# Altium PCB PCB_v2.PcbDoc
Units mm, origin at the board's own origin, x right, y up, seen from the top; angles counter-clockwise.
Board outline 65 x 45 mm, 2 copper layers (Top Layer, Bottom Layer); 48 components, 33 nets, 130 pads, 33 vias.
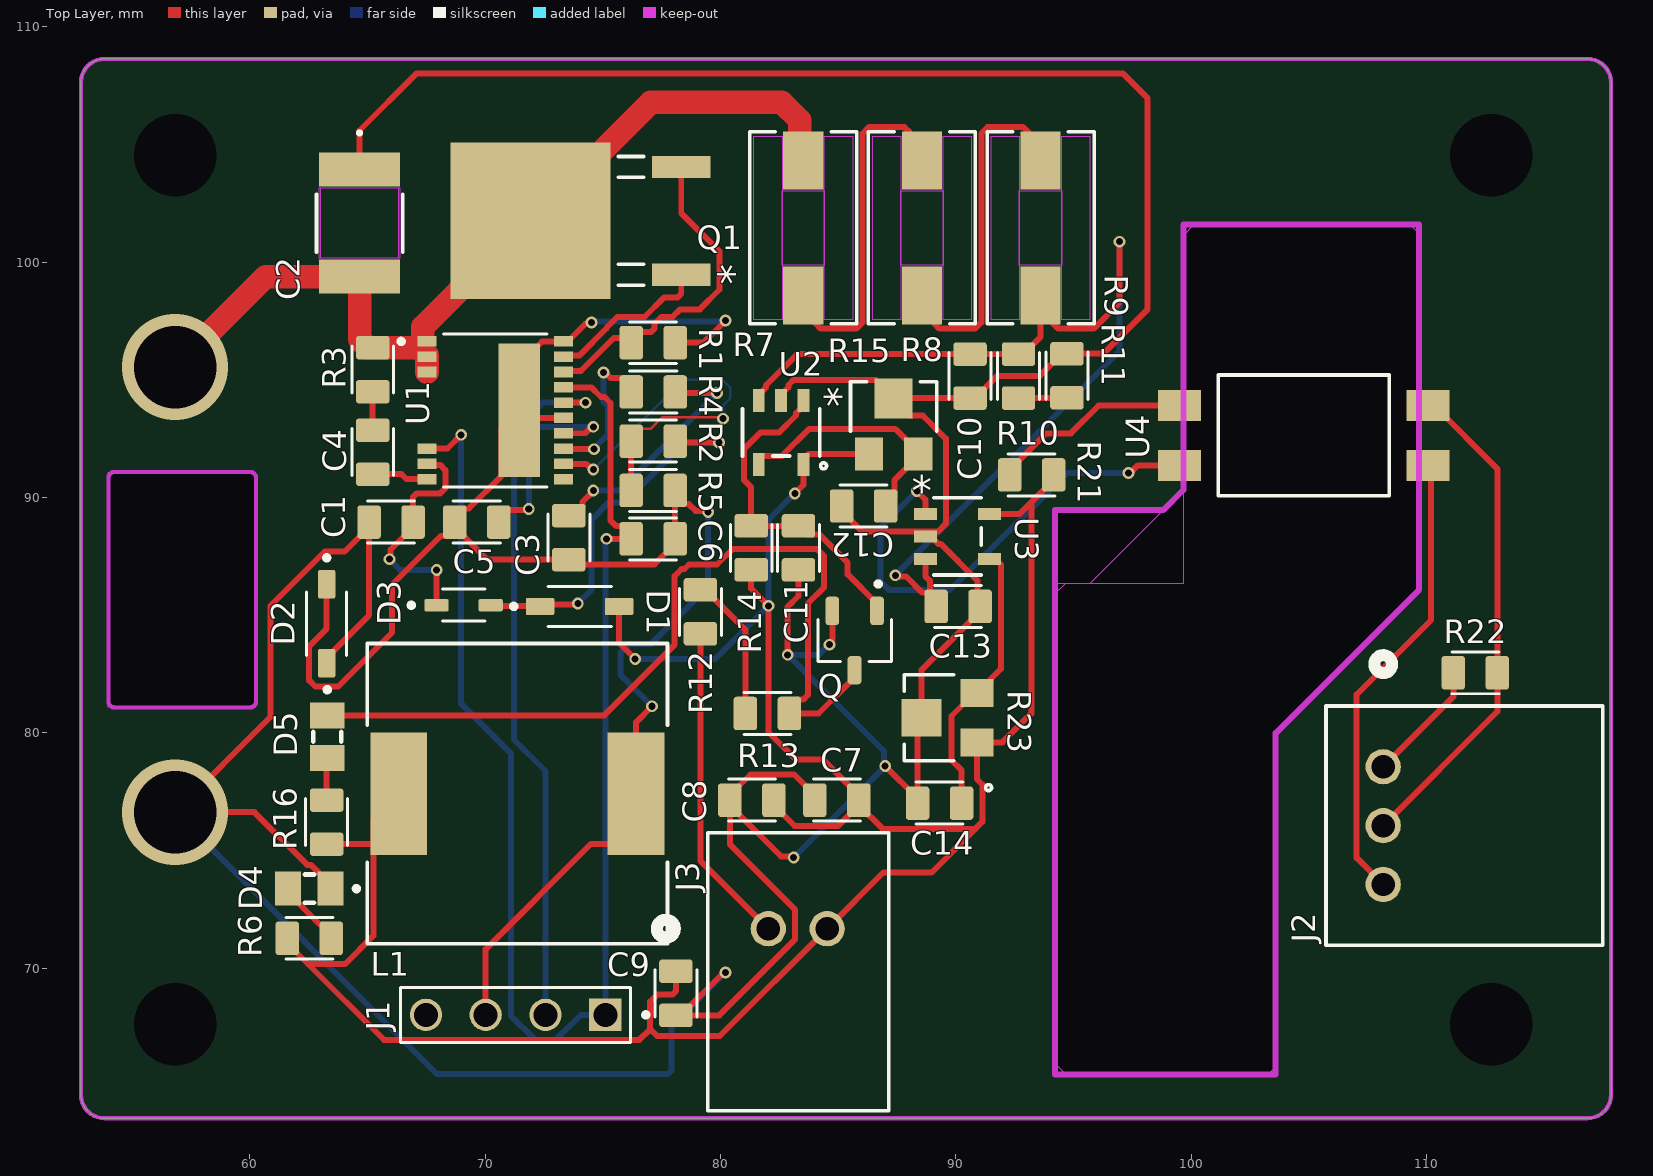
[diagram p0: Top Layer view]
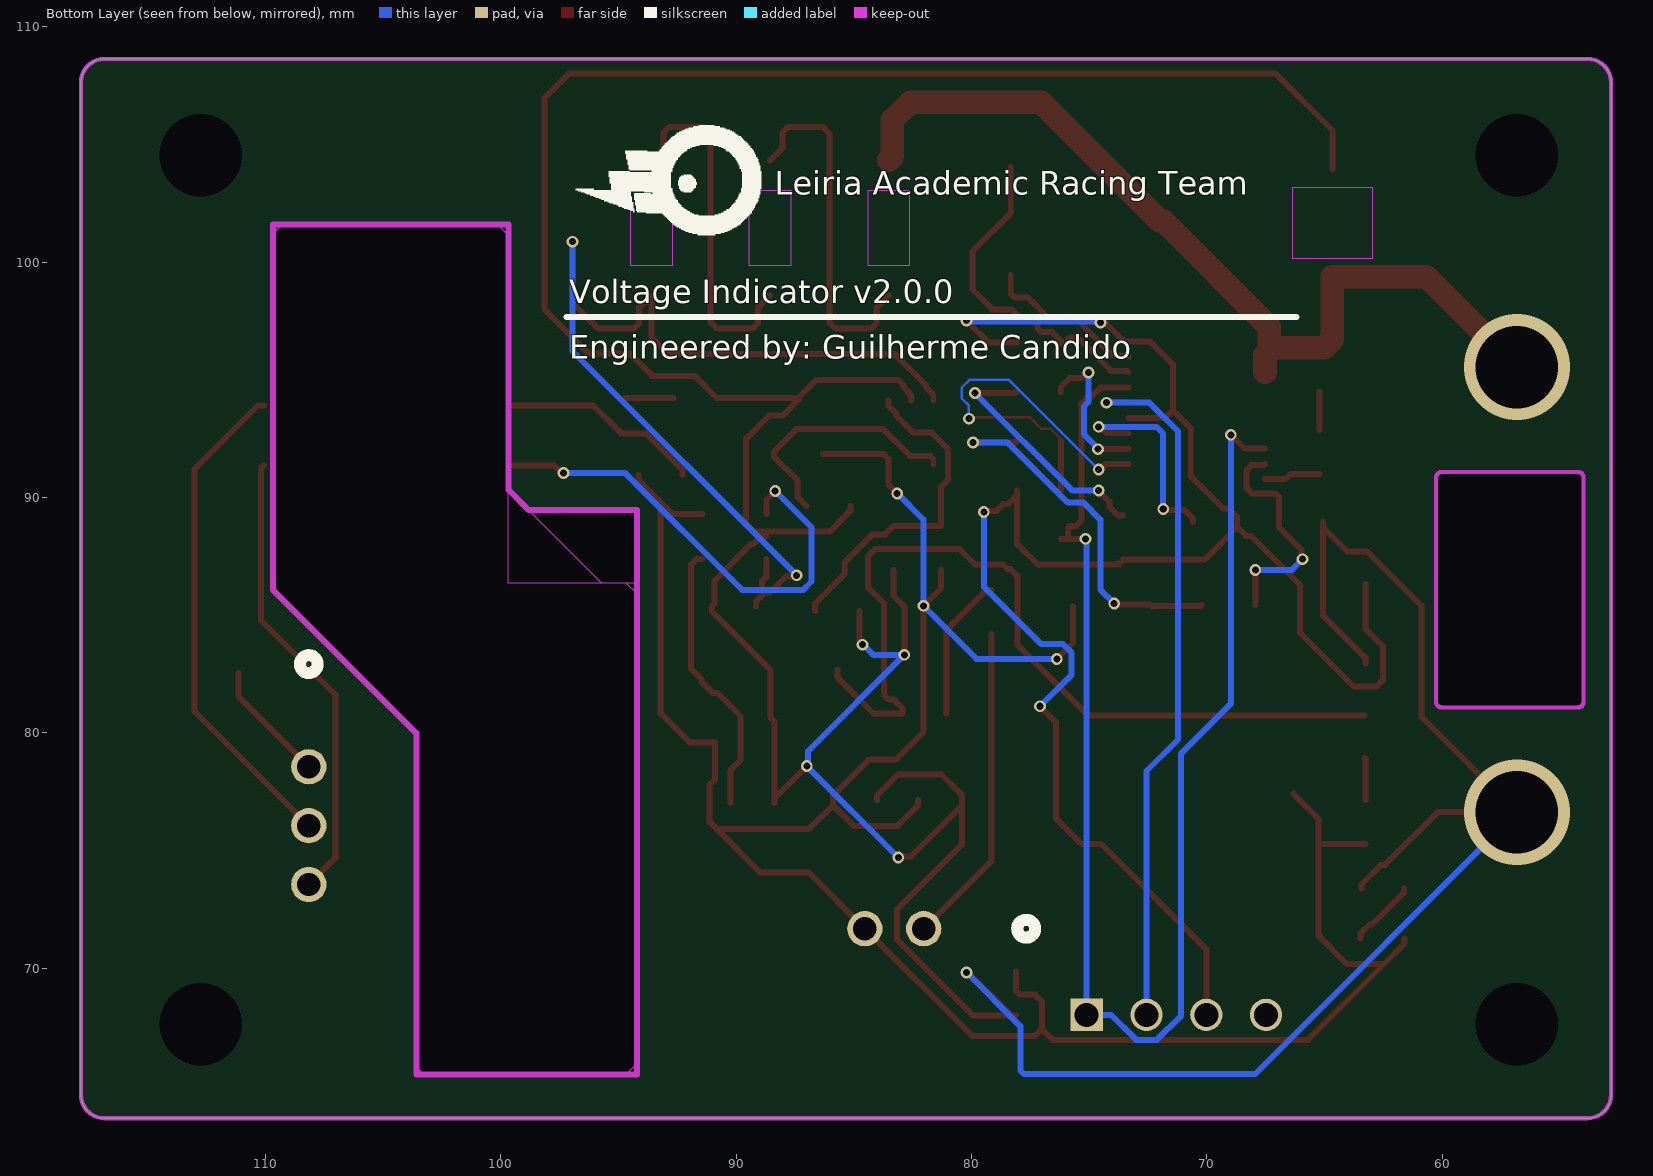
[diagram p1: Bottom Layer view, seen from below]
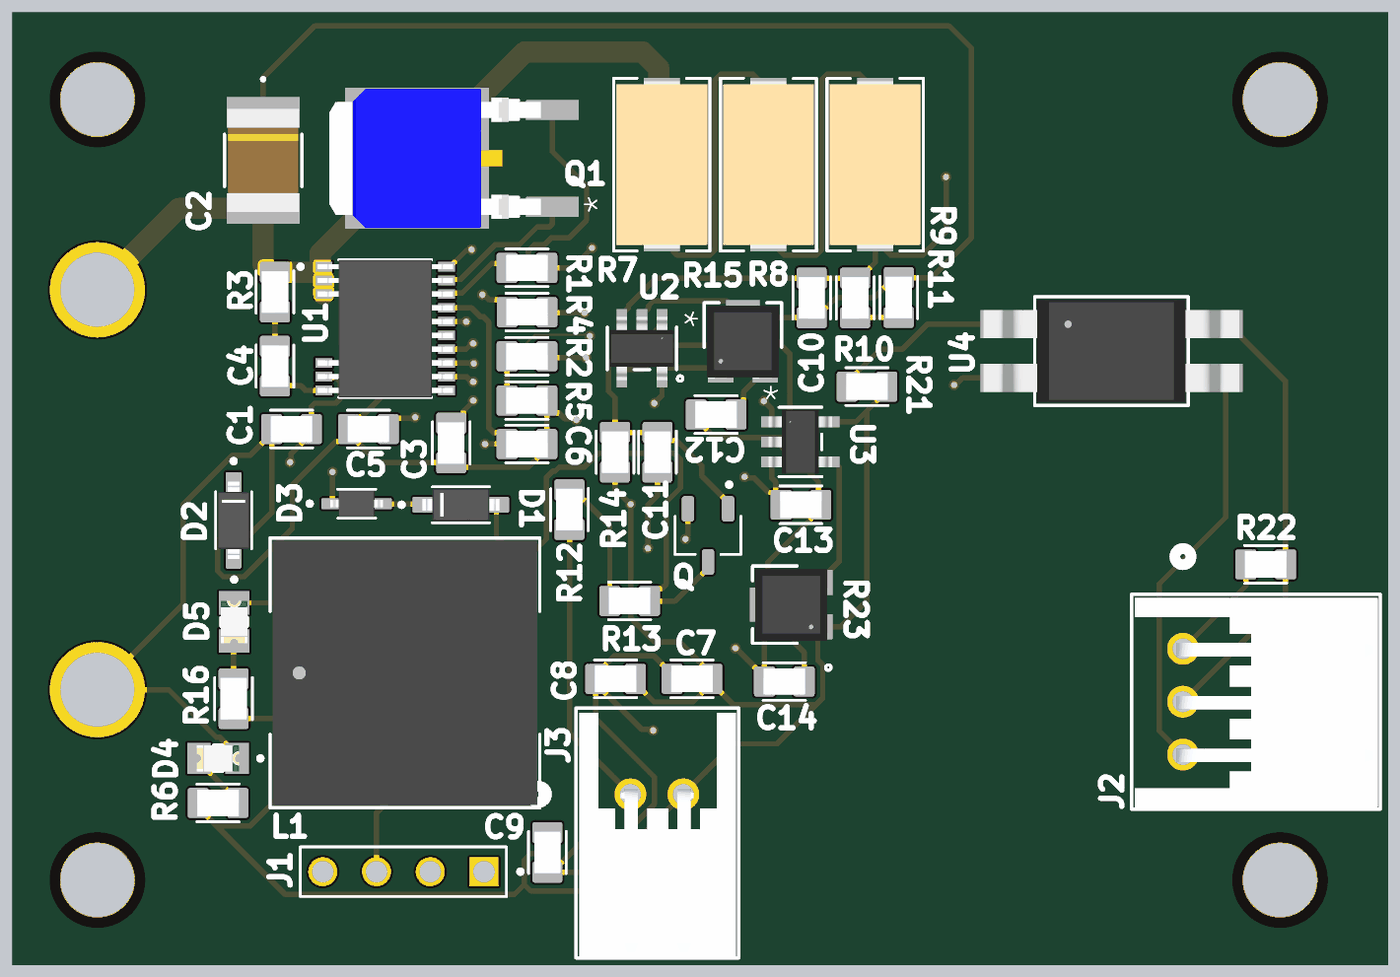
[diagram p2: 3D render of the assembled board from above, using the file's embedded part models]

## Layer stack, top to bottom
Top Solder: solder mask 0.0102, Solder Resist, Dk 3.5
Top Layer: signal copper 0.0356
Dielectric 1: dielectric 0.32, FR-4, Dk 4.8
Bottom Layer: signal copper 0.0356
Bottom Solder: solder mask 0.0102, Solder Resist, Dk 3.5

## Board outline
52.832,64.627 52.832,107.627 cw(c53.832,107.627) 53.832,108.627 116.832,108.627 cw(c116.832,107.627) 117.832,107.627 117.832,64.627 cw(c116.832,64.627) 116.832,63.627 53.832,63.627 cw(c53.832,64.627)
cut-out: 54,81.079 54,91.079 60.02,91.079 cw(c60.02,90.825) 60.274,90.825 60.274,81.333 cw(c60.02,81.333) 60.02,81.079
cut-out: 94.209,65.481 94.209,89.459 98.806,89.459 99.67,90.322 99.67,101.6 109.677,101.6 109.677,86.081 103.581,79.985 103.581,65.481
cut-out: 94.209,65.481 94.209,89.459 98.806,89.459 99.67,90.322 99.67,101.143 100.127,101.6 109.271,101.6 109.677,101.194 109.677,86.081 103.581,79.985 103.581,65.481
cut-out: 94.209,65.964 94.209,89.459 98.806,89.459 99.67,90.322 99.67,101.143 100.127,101.6 109.271,101.6 109.677,101.194 109.677,86.081 103.581,79.985 103.581,65.811 103.251,65.481 94.691,65.481
cut-out: 94.209,65.964 94.209,86.36 95.707,86.36 99.67,90.322 99.67,101.143 100.127,101.6 109.271,101.6 109.677,101.194 109.677,86.081 103.581,79.985 103.581,65.811 103.251,65.481 94.691,65.481
cut-out: 94.209,65.964 94.209,85.903 94.666,86.36 95.707,86.36 99.67,90.322 99.67,101.143 100.127,101.6 109.271,101.6 109.677,101.194 109.677,86.081 103.581,79.985 103.581,65.811 103.251,65.481 94.691,65.481
cut-out: 94.209,65.964 94.209,85.903 94.666,86.36 99.67,86.36 99.67,101.143 100.127,101.6 109.271,101.6 109.677,101.194 109.677,86.081 103.581,79.985 103.581,65.811 103.251,65.481 94.691,65.481

## Design rules (kind name [scope] priority, off if disabled: settings)
Clearance [All] p1: gap=0.254 ignorepadtopadclearanceinfootprint=FALSE except(0: Arc-Hole Track-Hole SMDPad-Hole THPad-Hole Via-Hole Fill-Hole Poly-Hole Region-Hole Text-Hole)
PolygonConnect [All] p1: connectstyle=Relief reliefconductorwidth=0.254 reliefentries=4 polygonreliefangle="90 Angle" airgapwidth=0.254
RoutingVias [All] p1: holewidth=0.711 width=1.27 viastyle="Through Hole" minholewidth=0.711 minwidth=1.27 maxholewidth=0.711 maxwidth=1.27
SolderMaskExpansion [All] p1: expansion=0.102 istentingtop=FALSE
Width [All] p1: maxlimit=1 minlimit=0.1 preferedwidth=0.5 minimp=50.000000 maximp=50.000000 favimp=50.000000
30 further rules are at their usual default settings.

## Classes and differential pairs
component class "Pre-Charge Detector": C13 C14 R21 R22 R23 U3 U4
component class Connectors: J2 J3
component class Buck: C1 C2 C3 C4 C5 C6 C7 C8 C9 D1 D2 D3 D4 J1 L1 Q1 R1 R2 R3 R4 R5 R6 U1
component class 60V_Detector: C10 C11 C12 D5 Q R7 R8 R9 R10 R11 R12 R13 R14 R15 R16 U2

## Components (designator, comment, footprint, x,y, rotation, side; value= is the part's Value field where it differs from the comment)
C1 "10uF 25V" 0805 66.01,88.951 r0 top
C2 "0.1uF 630VDC" 1812 64.668,101.651 r270 top
C3 "0.1uF" 0805 73.558,88.29 r90 top
C4 "10pF 630VDC" 0805 65.227,91.923 r270 top
C5 "0.1uF" 0805 69.647,88.951 r0 top
C6 "10uF 25V" 0805 77.14,88.24 r0 top
C7 "47uF" 0805 84.942,77.14 r0 top
C8 "47uF" 0805 81.331,77.14 r0 top
C9 "47uF" 0805 78.105,68.936 r90 top
C10 "10uF" 0805 90.602,95.153 r90 top
C11 "10uF" 0805 83.312,87.859 r90 top
C12 "0805_Capacitor" 0805 86.081,89.637 r0 top
C13 "10uF" 0805 90.094,85.369 r180 top
C14 "0805_Capacitor" 0805 89.306,77.013 r0 top
D1 "US1KFA" SOD123 74.016,85.369 r0 top
D2 "US1KFA" SOD123 63.271,84.633 r270 top
D3 "CMDSH-3TR" SOD-323 69.088,85.42 r0 top
D4 "LED 0805" "LED 0805" 62.535,73.381 r180 top
D5 "LED 0805" "LED 0805" 63.297,79.832 r270 top
J1 "4-POS 2.54mm Header" "4-POS 2.54mm Header" 75.108,68.021 r180 top
J2 "S3B-XH-A(LF)(SN)" "3P JST XH2.54mm 90º" 108.153,78.559 r270 top
J3 "S2B-XH-A-1(LF)(SN)" "2P JST XH2.54mm 90º" 82.031,71.679 r0 top
L1 "7447709102 - WURTH" "7447709102 - WURTH" 71.374,77.419 r0 top
Q "N-MOS" AO3402 85.7,83.922 r270 top
Q1 "N-MOS" "DPAK - MOSFET" 71.933,101.748 r90 top
R1 "220mR" 0805 77.14,96.571 r180 top
R2 "21.5k" 0805 77.14,92.388 r0 top
R3 "10k" 0805 65.227,95.428 r270 top
R4 "22.1k" 0805 77.145,94.48 r0 top
R5 "2.49k" 0805 77.14,90.297 r0 top
R6 "10k" 0805 62.535,71.272 r180 top
R7 "SMV1W390KJT" SMV1W390KJT 83.515,101.448 r90 top
R8 "SMV1W390KJT" SMV1W390KJT 88.557,101.448 r90 top
R9 "SMV1W390KJT" SMV1W390KJT 93.599,101.448 r90 top
R10 "10K" 0805 92.659,95.153 r270 top
R11 "10K" 0805 94.717,95.169 r90 top
R12 "10K" 0805 79.146,85.141 r270 top
R13 "10K" 0805 81.991,80.823 r180 top
R14 "10K" 0805 81.305,87.859 r270 top
R15 "3203X502P" 3203X103P 87.351,93.091 r0 top
R16 "10k" 0805 63.271,76.205 r270 top
R21 "10K" 0805 93.218,90.957 r0 top
R22 "0805_Resistor" 0805 112.065,82.55 r180 top
R23 "3203X502P" 3203X103P 89.637,80.645 r90 top
U1 "LT8316EFE#PBF" IC_LT8316EFE#PBF 70.434,93.701 r0 top
U2 "MIC6270YM5-TR" MIC6270 82.575,92.761 r270 top
U3 "MIC6270YM5-TR" MIC6270 90.068,88.341 r0 top
U4 "VO617A-3X018T" VO617A 104.775,92.634 r0 top

## Footprints (in the part's own frame and the unit in brackets; to place one, negate y for a bottom-side part, rotate by r counter-clockwise, add the part's x,y. Pads: shape width x height; smd on the part's side, far side on the other; paste and mask are expansions set on the pad)
"2P JST XH2.54mm 90º" [mil]
  round 59 / inner round 60 / far side round 59 hole 39 paste-99999 mask+0: 1(0,0) 2(98.43,0)
  silkscreen extent -186,-304 202,161, body extent -95,-301 196,151, height 240
"3P JST XH2.54mm 90º" [mil]
  round 59 / inner round 60 / far side round 59 hole 39 paste-99999 mask+0: 1(0,0) 2(98.43,0) 3(196.86,0)
  silkscreen extent -187,-96 298,367, body extent -95,-90 295,363, height 240
"4-POS 2.54mm Header" [mm]
  rect 1.37x1.37 hole 1.02: 1(0,0)
  round 1.37 hole 1.02: 2(2.54,0) 3(5.08,0) 4(7.62,0)
  silkscreen extent -1.82,-1.17 8.69,1.17
0805 [mm]
  rrect25% 1x1.42 smd: 1(-0.935,0) 2(0.935,0)
  silkscreen extent -1,-0.89 1,0.89, body extent -1,-0.63 1,0.63, height 0.6
1812 [mil]
  rect 57x136 smd paste+0 mask+0: 1(-89.5,0) 2(89.5,0)
  Top Layer keep-out region: -59,-65 -59,65 59,65 59,-65
  Keep-Out Layer region: -59,-67 -59,67 59,67 59,-67
  silkscreen extent -154,-72 49,72, body extent -96,-67 96,67, height 86
3203X103P [mil]
  rect 47x55 smd paste+0 mask+0: 1(-41.34,-49.4) 2(41.34,-49.4)
  rect 63x67 smd paste+0 mask+0: 3(0,43.4)
  silkscreen extent -122,-74 72,72, body extent -67,-69 67,69, height 81
"7447709102 - WURTH" [mil] "1000uH - 900mA"
  rect 95x205 smd paste+0 mask+0: 1(-198.5,0) 2(198.5,0)
  silkscreen extent -251,-251 251,251, body extent -246,-246 246,246, height 394
AO3402 [mm]
  rrect50% 1.21x0.59 smd: 1(-1.255,0.95) 2(-1.255,-0.95) 3(1.255,0)
  silkscreen extent -2.5,-1.56 0.9,1.56
"DPAK - MOSFET" [mil]
  rect 37x98 smd paste+0 mask+0: 1(-90.16,-252) 2(90.16,-252)
  rect 262x268 smd paste+0 mask+0: 3(0,0)
  silkscreen extent -108,-189 108,-147, body extent -130,-231 130,163, height 93
IC_LT8316EFE#PBF [mm]
  rect 0.8x0.45 smd: 1(-2.9,2.925) 2(-2.9,2.275) 3(-2.9,1.625) 8(-2.9,-1.625) 9(-2.9,-2.275) 10(-2.9,-2.925) 11(2.9,-2.925) 12(2.9,-2.275) 13(2.9,-1.625) 14(2.9,-0.975) 15(2.9,-0.325) 16(2.9,0.325) 17(2.9,0.975) 18(2.9,1.625) 19(2.9,2.275) 20(2.9,2.925)
  rect 1.78x5.68 smd paste-4: 21(1.016,0)
  silkscreen extent -4.1,-3.25 2.2,3.25, body extent -3.2,-3.25 3.2,3.25, height 1.19
"LED 0805" [mm]
  rect 1.1x1.45 smd: A(0.9,0) C(-0.9,0)
  silkscreen extent -2.1,-0.6 0.2,0.6, body extent -1,-0.63 1,0.63, height 0.7
MIC6270 [mil]
  rect 38.5x20 smd paste+0 mask+0: 1(-53.75,37.4) 2(-53.75,0) 3(-53.75,-37.4) 4(53.75,-37.4) 5(53.75,37.4)
  silkscreen extent -40,-65 40,65, body extent -59,-59 59,59, height 51
SMV1W390KJT [mil]
  rect 97x67 smd paste+0 mask+0: 1(-113,0) 2(113,0)
  Top Layer keep-out region: -62.5,-35.5 -62.5,35.5 62.5,35.5 62.5,-35.5
  Top Layer keep-out region: -153.5,35.5 -153.5,82.5 153.5,82.5 153.5,35.5
  Top Layer keep-out region: -153.5,-82.5 -153.5,-35.5 153.5,-35.5 153.5,-82.5
  Keep-Out Layer region: -62.5,-35.5 -62.5,35.5 62.5,35.5 62.5,-35.5
  silkscreen extent -160,-90 160,90, body extent -156,-84 156,84, height 152
SOD123 [mm]
  rrect18% 1.21x0.73 smd: A(1.68,0) C(-1.68,0)
  silkscreen extent -2.9,-0.85 1.35,0.85, body extent -1.83,-0.77 1.83,0.77, height 1.45
SOD-323 [mm]
  rrect25% 1.03x0.52 smd: A(1.15,0) C(-1.15,0)
  silkscreen extent -2.32,-0.68 0.9,0.68, body extent -1.24,-0.62 1.24,0.62, height 1.09
VO617A [mil]
  rect 72x52 smd paste+0 mask+0: 1(-208,50) 2(-208,-50) 3(208,-50) 4(208,50)
  silkscreen extent -143,-101 143,101, body extent -238,-96 238,96, height 163

## Part data
C1 C3 C4 C5 C6 C7 C8 C9 C10 C11 C13: library part 0805_Capacitor, Package="0805 AVX", Availability="In Stock", Check_prices=https://www.snapeda.com/parts/LD051A121KAB2A/AVX/view-part/?ref=eda, MF=AVX, MP=LD051A121KAB2A, Price=None, Purchase-URL=https://pricing.snapeda.com/search/part/LD051A121KAB2A/?ref=eda, SnapEDA_Link=https://www.snapeda.com/parts/LD051A121KAB2A/AVX/view-part/?ref=snap
C2: library part 1812_Capacitor, Package="0805 AVX", Availability="In Stock", Check_prices=https://www.snapeda.com/parts/LD051A121KAB2A/AVX/view-part/?ref=eda, MF=AVX, MP=LD051A121KAB2A, Price=None, Purchase-URL=https://pricing.snapeda.com/search/part/LD051A121KAB2A/?ref=eda, SnapEDA_Link=https://www.snapeda.com/parts/LD051A121KAB2A/AVX/view-part/?ref=snap
C12 C14: Package="0805 AVX", Availability="In Stock", Check_prices=https://www.snapeda.com/parts/LD051A121KAB2A/AVX/view-part/?ref=eda, MF=AVX, MP=LD051A121KAB2A, Price=None, Purchase-URL=https://pricing.snapeda.com/search/part/LD051A121KAB2A/?ref=eda, SnapEDA_Link=https://www.snapeda.com/parts/LD051A121KAB2A/AVX/view-part/?ref=snap
D1 D2: library part "SOD123 - Generic Diode", Package="SOD-123 Fairchild Semiconductor", Availability="In Stock", Check_prices=https://www.snapeda.com/parts/1N4148W-7-F/Diodes+Inc./view-part/?ref=eda, MF="Diodes Inc.", MP=1N4148W-7-F, Price=None, Purchase-URL=https://pricing.snapeda.com/search/part/1N4148W-7-F/?ref=eda, SnapEDA_Link=https://www.snapeda.com/parts/1N4148W-7-F/Diodes+Inc./view-part/?ref=snap
D3: "Diode Schottky 30V 100mA Surface Mount SOD-323", Package="SOD-323 Central Semiconductor", Availability=Unavailable, MF="Central Semiconductor", MP="CMDSH-3 TR", Price=None, SnapEDA_Link=https://www.snapeda.com/parts/CMDSH-3%20TR/Central%20Semiconductor%20Corp/view-part/447234/?ref=snap
D4 D5: "LED Uni-Color Green 4-Pin Chip 0805 T/R", Package=None, Availability=Unavailable, MP=597-3305-607F, Price=None
J1: Package=None, Availability=Unavailable, MP=5-146290-4, Price=None
J2: library part "3P JST XH2.54mm 90º", "No Description Available", Mfr_Name=JST, Copyright="Copyright (C) 2024 Ultra Librarian. All rights reserved.", Manufacturer_Part_Number=S3B-XH-A(LF)(SN), RefDes=RefDes, Type=DEV
J3: library part "2P JST XH2.54mm 90º", "No Description Available", Mfr_Name=JST, Copyright="Copyright (C) 2024 Ultra Librarian. All rights reserved.", Manufacturer_Part_Number=S2B-XH-A-1(LF)(SN), RefDes=RefDes, Type=DEV
L1: "1000uH - 900mA", Package="Nonstandard Bourns", Digi-Key_Part_Number=SRR1260-680MCT-ND, Digi-Key_Purchase_URL=https://www.digikey.com/product-detail/en/bourns-inc/SRR1260-680M/SRR1260-680MCT-ND/2127423?utm_source=snapeda&utm_medium=aggregator&utm_campaign=symbol, MF=Bourns, MP=SRR1260-680M, SnapEDA_Link=https://www.snapeda.com/parts/SRR1260-680M/Bourns/view-part/337191/?ref=snap
Q Q1: "D-PAK", Package="SOT-23 Alpha &amp; Omega Semiconductor", Digi-Key_Part_Number=785-1002-1-ND, Digi-Key_Purchase_URL=https://www.digikey.ca/product-detail/en/alpha-omega-semiconductor-inc/AO3402/785-1002-1-ND/1855944?utm_source=snapeda&utm_medium=aggregator&utm_campaign=symbol, MF="Alpha &", MP=AO3402, SnapEDA_Link=https://www.snapeda.com/parts/AO3402/Alpha%20&%20Omega%20Semiconductor%20Inc./view-part/564857/?ref=snap
R1 R2 R3 R4 R5 R6 R10 R11 R12 R13 R14 R16 R21: library part 0805_Resistor, Package=0805, Power_Rating=".25 W", Resistance=.33, Tolerance=1%, Availability="In Stock", Check_prices=https://www.snapeda.com/parts/2-2176053-0/TE+Connectivity/view-part/?ref=eda, EU_RoHS_Compliance="Compliant with Exemptions", MF="TE Connectivity", MP=2-2176053-0, Price=None, SnapEDA_Link=https://www.snapeda.com/parts/2-2176053-0/TE+Connectivity/view-part/?ref=snap
R7 R8 R9 R22: Package=0805, Power_Rating=".25 W", Resistance=.33, Tolerance=1%, Availability="In Stock", Check_prices=https://www.snapeda.com/parts/2-2176053-0/TE+Connectivity/view-part/?ref=eda, EU_RoHS_Compliance="Compliant with Exemptions", MF="TE Connectivity", MP=2-2176053-0, Price=None, SnapEDA_Link=https://www.snapeda.com/parts/2-2176053-0/TE+Connectivity/view-part/?ref=snap
R15 R23: library part 3203X103P, "No Description Available", Mfr_Name="TE Connectivity", Copyright="Copyright (C) 2024 Ultra Librarian. All rights reserved.", Manufacturer_Part_Number=3203X502P, RefDes=RefDes, Type=DEV
U1: "560VIN Micropower No-Opto Isolated Flyback Controller", Package="TSSOP -20 Analog Devices", Availability="In Stock", Check_prices=https://www.snapeda.com/parts/LT8316EFE%23PBF/Analog+Devices/view-part/?ref=eda, MF="Analog Devices", MP=LT8316EFE#PBF, Price=None, Purchase-URL=https://pricing.snapeda.com/search/part/LT8316EFE#PBF/?ref=eda, SnapEDA_Link=https://www.snapeda.com/parts/LT8316EFE%23PBF/Analog+Devices/view-part/?ref=snap
U2 U3: "No Description Available", Mfr_Name=Microchip, Copyright="Copyright (C) 2024 Ultra Librarian. All rights reserved.", Manufacturer_Part_Number=MIC6270YM5-TR, RefDes=RefDes, Type=DEV
U4: library part VO617A, "VO617A-3X018T Optocoupler Dc-in 1-CH Transistor Dc-out 4-PIN PDIP SMD T/r", NexarPartId=68099910, Number of Channels=1

## Free pads (board coordinates)
  round 1.524 hole 3.5 mask+1.5: 5(56.832,67.627) 5(56.832,104.531) 5(112.743,67.627) 5(112.743,104.531)

## Via types
v1: diameter 0.5, hole 0.3, Top Layer to Bottom Layer, tented both sides, 31 vias
v2: diameter 4.5, hole 3.5, Top Layer to Bottom Layer, 2 vias

## Nets (pads, with @x,y where several pads share a name; then routed paths per layer and width w, separated by ;. In a path a pad name is that pad's centre, name@x,y a point inside that pad or via, vN(x,y) a via of type N, cw(c..) or ccw(c..) an arc to the next point about the centre after c; other vN are vias at no path point)
+12: C7.2 C8.2 C9.2 D1.A J3.2 L1.1 R6.2 R14.2 R15.1 R16.2 R21.2 R23.1 U2.5 U3.5 | length 110.6
  Top Layer w0.254: R6.2 61.6,71.062 62.481,70.181 ; R16.2 L1.1@65.253,75.27 ; L1.1 65.253,76.34 L1.1@65.253,75.27 ; D1.A 75.696,83.816 v1(76.378,83.134) ; C9.2 78.105,69.03 77.956,68.882 77.31,68.882 77.014,68.585 77.014,67.416 ; R14.2 81.305,86.131 v1(82.042,85.395) 82.042,80.031 83.198,78.876 84.352,78.876 85.877,77.35 C7.2 C7.2@85.877,76.93 ; C8.2 82.266,76.93 83.147,76.049 84.996,76.049 C7.2@85.877,76.93 ; v1(83.16,90.17) 83.525,90.536 U2.5 83.525,91.63 83.731,91.836 R15.1 ; U3.5 92.697,89.291 93.205,89.799 ; R21.2 94.153,90.747 93.205,89.799 ; 62.481,70.181 65.707,66.955 76.553,66.955 77.014,67.416 ; 62.481,70.181 64.054,70.181 65.253,71.38 L1.1@65.253,75.27 ; 77.014,67.416 77.31,67.12 79.972,67.12 J3.2 86.92,74.068 88.972,74.068 90.826,75.922 ; C7.2@85.877,76.93 86.885,75.922 90.826,75.922 ; 90.826,75.922 91.122,76.218 91.122,77.807 90.891,78.038 R23.1 91.971,79.595 93.205,80.829 93.205,89.799
  Bottom Layer w0.254: v1(76.378,83.134) 79.781,83.134 v1(82.042,85.395) 82.042,89.052 v1(83.16,90.17)
BIAS: C1.2 D3.C U1.9 | length 9.9
  Top Layer w0.254: v1(65.938,87.376) 65.985,87.423 65.985,87.781 66.945,88.741 C1.2 66.945,90.021 67.094,90.17 68.092,90.17 68.315,90.393 68.315,91.158 68.092,91.382 67.578,91.382 U1.9 ; D3.C 67.945,85.427 v1(67.945,86.919)
  Bottom Layer w0.254: v1(65.938,87.376) 66.396,86.919 v1(67.945,86.919)
GND: C1.1 C2.1 C7.1 C8.1 C9.1 C10.1 C11.1 C12.1 C13.1 C14.1 D2.A D4.C Q.2 R11.2 R15.3 R23.3 U2.2 U3.2 | length 196
  Top Layer w0.254: D2.A 63.271,83.193 65.075,84.996 C1.1@65.075,88.741 ; D4.C 63.435,73.556 62.602,74.389 62.44,74.389 60.202,76.627 v2(56.832,76.627) 60.884,80.679 60.884,85.396 63.191,87.702 64.036,87.702 C1.1@65.075,88.741 ; C2.1 64.668,105.588 67.081,108.001 97.104,108.001 98.146,106.959 98.146,97.993 96.256,96.104 R11.2 94.507,96.104 93.564,95.161 91.755,95.161 90.812,94.218 C10.1 87.375,94.218 R15.3 ; C1.1 C1.1@65.075,88.741 ; C9.1 C9.1@78.315,68.001 ; v1(80.213,69.825) 80.166,69.778 80.092,69.778 C9.1@78.315,68.001 ; U2.2 82.575,94.361 82.89,94.676 82.89,94.773 83.114,94.996 86.599,94.996 87.351,94.244 R15.3 ; v1(82.855,83.312) 82.855,85.353 83.312,85.81 C11.1 ; v1(83.109,74.701) 83.062,74.748 82.577,74.748 C8.1@80.396,76.93 ; C7.1 84.007,77.35 83.126,78.231 81.277,78.231 80.396,77.35 C8.1 C8.1@80.396,76.93 ; v1@84.75,83.927 Q.2 ; C12.1 85.146,89.427 86.027,88.546 89.239,88.546 89.573,88.879 89.573,92.498 88.602,93.469 88.024,93.469 87.351,94.143 R15.3 ; v1(86.995,78.588) 87.007,78.588 C14.1@88.371,77.223 ; C14.1 C14.1@88.371,77.223 ; U3.2 88.938,88.341 89.253,88.026 89.35,88.026 90.916,86.46 90.916,85.482 C13.1 91.029,85.159 88.534,82.665 R23.3 88.371,80.482 C14.1@88.371,77.223 ; C9.1@78.315,68.001 79.951,68.001 83.162,71.211 83.162,72.501 80.396,75.267 C8.1@80.396,76.93
  Bottom Layer w0.254: v2(56.832,76.627) 67.952,65.507 77.778,65.507 77.927,65.655 77.927,67.539 v1(80.213,69.825) ; v1(83.109,74.701) v1(86.995,78.588) 86.948,78.634 86.948,79.219 v1(82.855,83.312) 84.172,83.312 84.604,83.744 v1(84.633,83.744)
INTVCC: C6.1 J1.1 U1.8 U1.17 | length 61.8
  Top Layer w0.254: U1.8 68.403,92.076 v1(68.986,92.659) ; U1.17 74.514,94.676 74.925,94.264 75.077,94.264 75.329,94.013 75.329,93.188 75.324,93.183 75.324,89.026 75.574,88.776 75.832,88.776 75.9,88.708 C6.1@75.9,88.24 ; v1(75.159,88.24) C6.1@75.9,88.24 ; C6.1 C6.1@75.9,88.24
  Bottom Layer w0.254: v1(68.986,92.659) 68.986,81.239 71.094,79.132 71.094,67.988 72.126,66.955 73.009,66.955 74.075,68.021 J1.1 75.108,88.015 75.112,88.019 75.112,88.193 v1(75.159,88.24)
"LV GND": J2.3 U4.3 | length 19.6
  Top Layer w0.254: J2.3 107.023,74.689 107.023,81.629 110.185,84.792 110.185,91.237 U4.3
NetC2_2: C2.2 Q1.3 R3.1 R7.2 U1.1 U1.2 U1.3 | length 39
  Top Layer w1: v2(56.832,95.531) 60.678,99.377 C2.2 64.668,96.712 65.017,96.363 R3.1 67.213,96.363 67.361,96.215 ; U1.3 U1.2 67.534,96.042 67.361,96.215 ; R7.2 83.368,104.465 83.368,106.017 82.603,106.782 77.042,106.782 72.009,101.748 Q1.3 71.857,101.748 67.361,97.253 67.361,96.215
NetC3_2: C3.2 R4.2 | length 10.4
  Top Layer w0.254: C3.2 73.768,89.225 74.141,89.598 74.141,89.808 74.599,90.266 v1(74.6,90.297) ; R4.2 78.122,94.437 v1(79.858,94.437)
  Bottom Layer w0.254: v1(74.6,90.297) 75.717,90.297 v1(79.858,94.437)
NetC4_1: C4.1 R3.2 | length 1.6
  Top Layer w0.254: C4.1 R3.2
NetC4_2: C4.2 U1.10 | length 2.4
  Top Layer w0.254: C4.2 66.452,90.988 66.664,90.776 U1.10
NetC5_2: C5.2 U1.14 | length 9
  Top Layer w0.254: C5.2 70.582,89.09 70.955,89.463 71.81,89.463 v1(71.857,89.51) ; U1.14 74.261,92.726 74.533,92.998 v1(74.6,92.998)
  Bottom Layer w0.254: v1(71.857,89.51) 71.857,92.714 72.141,92.998 v1(74.6,92.998)
NetC10_2: C10.2 C13.2 R9.1 R10.1 U2.3 U3.3 | length 44.6
  Top Layer w0.254: U2.3 81.625,94.361 81.94,94.676 81.94,94.773 83.256,96.088 C10.2 R10.1 92.869,96.088 93.599,96.818 R9.1 94.12,98.057 94.12,97.391 94.343,97.168 95.852,97.168 96.952,98.267 v1(96.952,100.863) ; v1(87.427,86.69) 87.474,86.643 87.885,86.643 88.576,85.952 88.786,85.952 C13.2@88.892,85.846 ; U3.3 88.703,86.65 88.892,86.46 C13.2@88.892,85.846 ; C13.2 89.159,85.579 C13.2@88.892,85.846
  Bottom Layer w0.254: v1(87.427,86.69) 96.952,96.215 v1(96.952,100.863)
NetC11_2: C11.2 Q.1 R14.1 U2.1 | length 14.3
  Top Layer w0.254: U2.1 83.525,93.891 83.21,93.576 83.21,93.479 82.492,92.761 81.709,92.761 80.99,92.042 80.99,90.749 81.305,90.434 R14.1 C11.2 83.685,88.421 84.209,88.421 85.406,87.224 85.406,86.731 86.65,85.487 Q.1
NetC12_2: C12.2 R15.2 U2.4 | length 10.8
  Top Layer w0.254: U2.4 81.625,91.63 81.752,91.757 82.606,91.757 83.764,92.916 87.423,92.916 88.401,91.938 R15.2 88.401,91.735 87.389,90.723 87.389,90.01 C12.2
NetC14_2: C14.2 R23.2 U3.4 | length 11.9
  Top Layer w0.254: C14.2 90.241,78.411 89.812,78.84 89.812,80.717 90.79,81.695 R23.2 90.993,81.695 91.463,82.165 91.463,82.267 91.91,82.713 91.91,87.15 91.669,87.391 U3.4
NetD1_C: D1.C D3.A R2.2 | length 16.2
  Top Layer w0.254: D3.A 70.263,85.395 72.31,85.395 D1.C 72.416,85.449 73.892,85.449 v1(73.939,85.496) ; R2.2 78.134,92.329 v1(79.934,92.329)
  Bottom Layer w0.254: v1(73.939,85.496) 74.528,86.085 74.528,89.056 75.26,89.789 75.928,89.789 78.468,92.329 v1(79.934,92.329)
NetD4_A: D4.A R6.1 | length 2.9
  Top Layer w0.254: D4.A 61.635,73.206 62.985,71.855 63.097,71.855 63.47,71.482 R6.1
NetD5_A: D5.A R16.1 | length 1.8
  Top Layer w0.254: R16.1 63.271,78.907 D5.A
NetD5_C: D5.C Q.3 R13.1 | length 37
  Top Layer w0.254: D5.C 75.043,80.732 78.055,83.745 78.055,86.66 78.352,86.957 78.473,86.957 78.665,87.149 79.855,87.149 80.511,87.805 84.107,87.805 84.403,87.508 84.403,86.182 83.718,85.498 83.718,81.615 83.509,81.406 83.299,81.406 82.926,81.033 R13.1 84.166,80.823 85.7,82.357 Q.3
NetJ2_1: J2.1 R22.2 | length 5.2
  Top Layer w0.254: J2.1 111.13,81.535 R22.2
NetJ2_2: J2.2 R22.1 U4.4 | length 21.2
  Top Layer w0.254: J2.2 113,80.905 R22.1 113,91.216 110.312,93.904 U4.4
NetJ3_1: J3.1 R12.2 | length 13.7
  Top Layer w0.254: R12.2 79.146,74.564 J3.1
NetQ1_1: Q1.1 U1.19 | length 6.9
  Top Layer w0.254: U1.19 73.378,96.02 74.001,96.02 75.155,97.173 75.155,97.196 75.62,97.662 76.772,97.662 77.61,98.5 78.185,98.5 78.334,98.649 Q1.1
NetQ1_2: Q1.2 R1.2 U1.18 | length 13.9
  Top Layer w0.254: U1.18 73.378,95.37 74.07,95.37 75.473,96.773 75.892,96.773 R1.2@75.9,96.781 ; R1.2 76.205,96.644 76.578,97.017 77.045,97.017 77.194,97.166 77.194,97.365 77.49,97.662 77.955,97.662 78.286,97.992 79.121,97.992 79.959,98.831 79.959,100.45 78.334,102.076 Q1.2
NetR2_1: R2.1 R5.1 U1.12 | length 16.8
  Top Layer w0.1: R2.1 76.205,92.479 76.649,92.923 77.043,92.923 77.522,93.402 80.054,93.402 v1(80.112,93.345)
  Top Layer w0.254: U1.12 74.294,91.426 74.533,91.186 v1(74.6,91.186) ; R5.1 R2.1
  Bottom Layer w0.1: v1(74.6,91.186) 78.405,94.991 80.087,94.991 80.412,94.667 80.412,94.208 80.112,93.908 v1(80.112,93.345)
NetR4_1: R4.1 U1.13 | length 6.5
  Top Layer w0.254: U1.13 73.347,92.063 74.612,92.063 v1(74.625,92.05) ; v1(75.032,95.301) 75.098,95.301 75.336,95.063 75.837,95.063 76.21,94.69 R4.1
  Bottom Layer w0.254: v1(74.625,92.05) 74.625,92.085 75.231,92.691 75.231,93.863 75.032,94.062 v1(75.032,95.301)
NetR7_1: R7.1 R8.2 | length 15.2
  Top Layer w0.254: R7.1 84.036,98.057 84.036,97.391 84.259,97.168 85.769,97.168 86.036,97.435 86.036,105.46 86.304,105.727 87.813,105.727 88.036,105.504 88.036,104.838 R8.2
NetR8_1: R8.1 R9.2 | length 15.2
  Top Layer w0.254: R8.1 89.078,98.057 89.078,97.391 89.301,97.168 90.81,97.168 91.078,97.435 91.078,105.46 91.346,105.727 92.855,105.727 93.078,105.504 93.078,104.838 R9.2
NetR10_2: R10.2 R11.1 | length 2.1
  Top Layer w0.254: R10.2 92.667,94.226 94.709,94.226 R11.1
NetR12_1: R12.1 R13.2 | length 6.2
  Top Layer w0.254: R12.1 79.356,86.076 81.056,84.376 R13.2
NetR21_1: R21.1 U4.1 | length 8.6
  Top Layer w0.254: R21.1 92.283,91.167 93.838,92.722 94.88,92.722 96.062,93.904 U4.1
NetU3_1: U3.1 U4.2 | length 20.7
  Top Layer w0.254: v1(88.341,90.272) 88.703,89.91 U3.1 ; v1(97.333,91.034) 97.399,91.034 97.73,91.364 U4.2
  Bottom Layer w0.254: v1(88.341,90.272) 86.796,88.726 86.796,86.429 87.165,86.059 89.729,86.059 94.703,91.034 v1(97.333,91.034)
SMODE: J1.2 U1.16 | length 29.8
  Top Layer w0.254: U1.16 v1(74.271,94.026)
  Bottom Layer w0.254: J1.2 72.568,78.376 71.226,79.718 71.226,92.801 72.45,94.026 v1(74.271,94.026)
VGND: C3.1 C5.1 C6.2 D2.C J1.3 L1.2 R1.1 R5.2 U1.15 U1.20 U1.21 | length 78.7
  Top Layer w0.254: D2.C 63.271,84.423 62.525,83.677 62.525,82.228 62.787,81.967 63.756,81.967 66.047,84.258 66.047,86.286 68.129,88.368 68.339,88.368 C5.1@68.712,88.741 ; J1.3 70.028,70.813 74.499,75.285 75.336,75.285 76.416,76.364 L1.2 76.416,80.454 v1(77.089,81.128) ; U1.15 71.775,93.376 U1.21 ; v1(74.524,97.434) 74.477,97.387 74.271,97.387 73.509,96.626 U1.20 72.425,96.626 71.45,95.651 U1.21 ; R5.2 R5.2@78.075,90.087 ; R1.1 79.273,96.571 v1(80.213,97.511) ; v1(79.477,89.383) 79.43,89.43 78.942,89.43 78.658,89.714 78.448,89.714 R5.2@78.075,90.087 ; C5.1@68.712,88.741 C5.1 68.712,89.161 69.085,89.534 69.315,89.534 70.687,90.906 70.687,92.938 U1.21 ; C5.1@68.712,88.741 70.097,87.355 C3.1 73.765,87.149 77.194,87.149 78.075,88.03 C6.2 R5.2@78.075,90.087
  Bottom Layer w0.254: v1(74.524,97.434) 74.562,97.472 80.175,97.472 v1(80.213,97.511) ; v1(77.089,81.128) 75.747,82.47 75.747,83.396 76.116,83.765 77.042,83.765 79.477,86.2 v1(79.477,89.383)
pads on no net: J1.4 U1.11

## Keep-outs
Keep-Out Layer:
  lines w0.18: 52.832,64.627 ccw(c53.832,64.627) 53.832,63.627 116.832,63.627 ccw(c116.832,64.627) 117.832,64.627 117.832,107.627 ccw(c116.832,107.627) 116.832,108.627 53.832,108.627 ccw(c53.832,107.627) 52.832,107.627 52.832,64.627 ; 54,81.333 ccw(c54.254,81.333) 54.254,81.079 60.02,81.079 ccw(c60.02,81.333) 60.274,81.333 60.274,90.825 ccw(c60.02,90.825) 60.02,91.079 54.254,91.079 ccw(c54.254,90.825) 54,90.825 54,81.333
  lines w0.254: 94.209,65.481 94.209,89.459 98.806,89.459 99.67,90.322 99.67,101.6 109.677,101.6 109.677,87.122 109.677,86.081 103.581,79.985 103.581,65.481 94.209,65.481

## Silkscreen, mask and mechanical layers (free items; w line width, h text height)
Bottom Overlay:
  drawing of 3 lines, arcs and shapes, not listed
  text "Leiria Academic Racing Team" at 88.367,102.848 h1
  text "Voltage Indicator v2.0.0" at 97.079,98.25 h1
  text "Engineered by: Guilherme Candido" at 97.079,95.888 h1

## Text inside footprints (layer, text, board x,y; h text height)
Q1: Top Overlay "*" at 81.153,99.035 h1.27 r90; Mechanical 13 "*" at 75.362,99.141 h1.27 r90
U2: Top Overlay "*" at 83.906,94.698 h1.27 r270; Mechanical 13 "*" at 82.814,93.701 h1.27 r270
U3: Top Overlay "*" at 88.132,89.672 h1.27; Mechanical 13 "*" at 89.129,88.58 h1.27
U4: Top Overlay "*" at 98.92,95.098 h0; Mechanical 13 "*" at 101.333,93.726 h0